# Altium PCB PCB2.PcbDoc
Units mil, origin at the board's own origin, x right, y up, seen from the top; angles counter-clockwise.
Board outline 3200 x 1735 mil, 2 copper layers (Top Layer, Bottom Layer); 117 components, 27 nets, 453 pads, 33 vias.
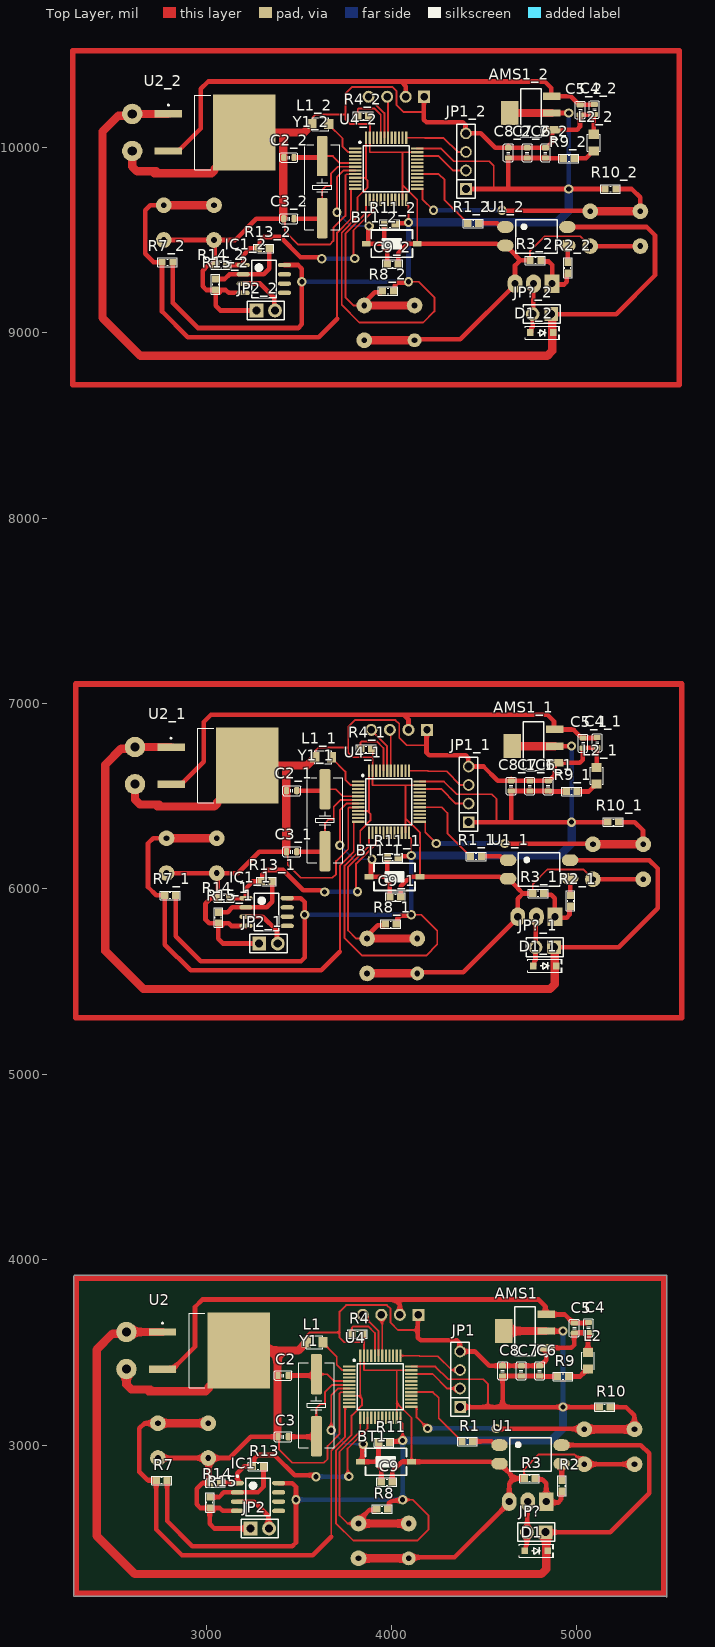
[diagram p0: Top Layer view]
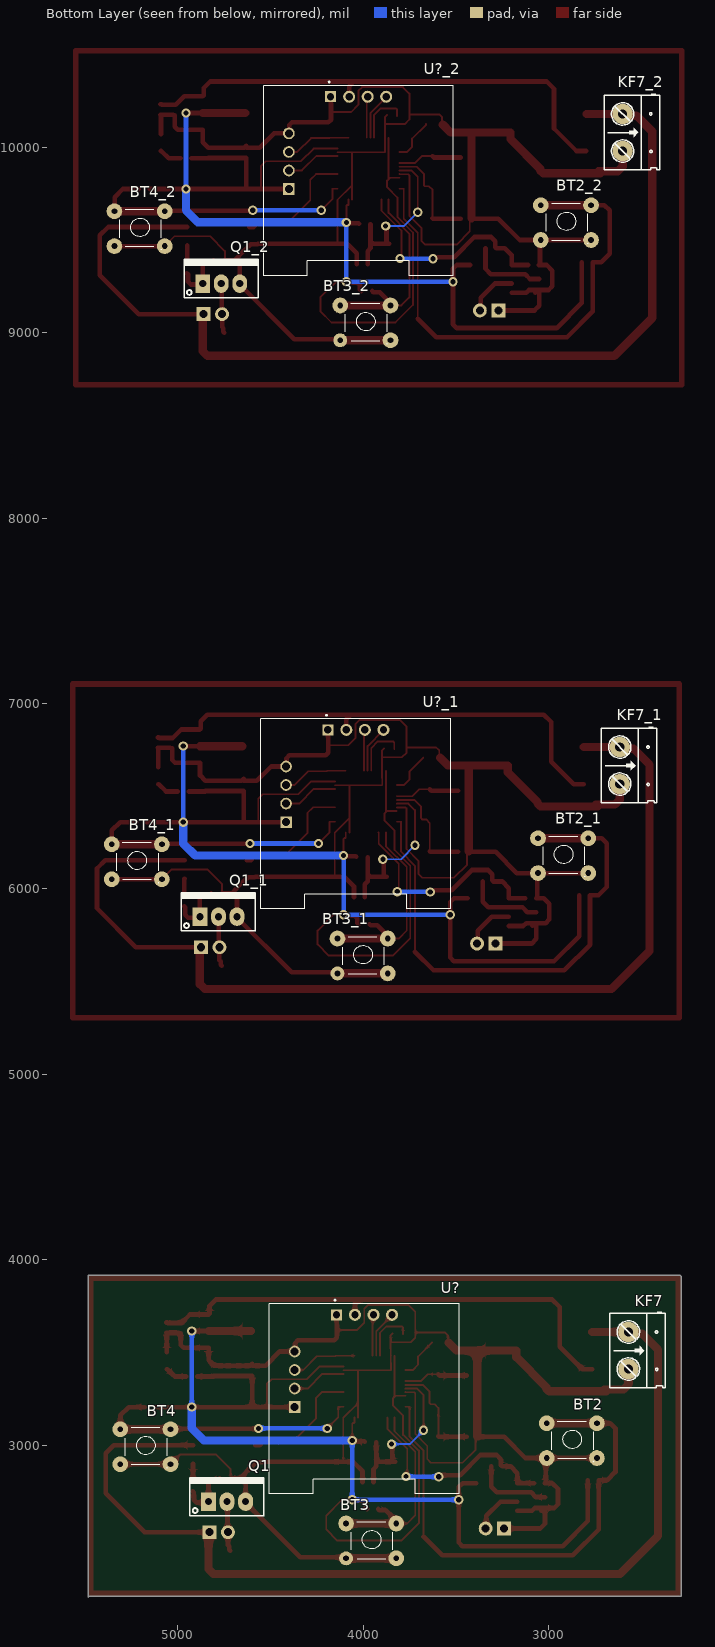
[diagram p1: Bottom Layer view, seen from below]

## Layer stack, top to bottom
Top Solder: solder mask 0.4, Solder Resist, Dk 3.5
Top Layer: signal copper 1.4
Dielectric 1: dielectric 12.6, FR-4, Dk 4.8
Bottom Layer: signal copper 1.4
Bottom Solder: solder mask 0.4, Solder Resist, Dk 3.5

## Board outline
2290,3915 5485,3915 5485,2180 5480,2185 2285,2185 2285,3910

## Design rules (kind name [scope] priority, off if disabled: settings)
Clearance [All] p1: gap=8 ignorepadtopadclearanceinfootprint=FALSE
PolygonConnect [All] p1: connectstyle=Relief reliefconductorwidth=10 reliefentries=4 polygonreliefangle="90 Angle" airgapwidth=10
RoomDefinition Sheet1 [InComponentClass('Sheet1')] p1: confinementstyle=ConfineIn formatcopy=TRUE lockcomponents=FALSE outline 7045,1060 17040,1060 17040,1850 7045,1850
RoutingVias [All] p1: holewidth=28 width=50 viastyle="Through Hole" minholewidth=28 minwidth=50 maxholewidth=28 maxwidth=50
SolderMaskExpansion [All] p1: expansion=4 istentingtop=FALSE
Width [All] p1: maxlimit=45 minlimit=10 preferedwidth=25
30 further rules are at their usual default settings.

## Classes and differential pairs
component class Sheet1: 10K AMS1 BT1 BT2 BT3 BT4 C2 C3 C4 C5 C6 C7 C8 C9 D1 IC1 JP1 JP2 JP? KF7 L1 L2 Q1 R1 R2 R3 R4 R7 R8 R9 R10 R11 R13 R14 R15 U1 U2 U3 U4 U? Y1

## Components (designator, comment, footprint, x,y, rotation, side; value= is the part's Value field where it differs from the comment)
AMS1 "AMS1117-3.3V" SOT223 4720,3615 r90 top value="AMS1117-3.3V SOT223"
AMS1_1 "AMS1117-3.3V" SOT223 4766.47,6770.3 r90 top value="AMS1117-3.3V SOT223" (schematic designator AMS1)
AMS1_2 "AMS1117-3.3V" SOT223 4751.47,10185.3 r90 top value="AMS1117-3.3V SOT223" (schematic designator AMS1)
BT1 "Nut Nhan 2 Chan SMD 3x6x2.5" "Nut Nhan 2 Chan SMD 3x6x2.5" 3970,2910 r180 top
BT1_1 "Nut Nhan 2 Chan SMD 3x6x2.5" "Nut Nhan 2 Chan SMD 3x6x2.5" 4016.47,6065.3 r180 top (schematic designator BT1)
BT1_2 "Nut Nhan 2 Chan SMD 3x6x2.5" "Nut Nhan 2 Chan SMD 3x6x2.5" 4001.47,9480.3 r180 top (schematic designator BT1)
BT2 "Nut Nhan 4 Chan Cam 6x6" "Nut Nhan 4 Chan Cam 6x6"#1 2998,3126 r180 bottom
BT2_1 "Nut Nhan 4 Chan Cam 6x6" "Nut Nhan 4 Chan Cam 6x6"#1 3044.47,6281.3 r180 bottom (schematic designator BT2)
BT2_2 "Nut Nhan 4 Chan Cam 6x6" "Nut Nhan 4 Chan Cam 6x6"#1 3029.47,9696.3 r180 bottom (schematic designator BT2)
BT3 "Nut Nhan 4 Chan Cam 6x6" "Nut Nhan 4 Chan Cam 6x6"#2 4080,2585 r180 bottom
BT3_1 "Nut Nhan 4 Chan Cam 6x6" "Nut Nhan 4 Chan Cam 6x6"#2 4126.47,5740.3 r180 bottom (schematic designator BT3)
BT3_2 "Nut Nhan 4 Chan Cam 6x6" "Nut Nhan 4 Chan Cam 6x6"#2 4111.47,9155.3 r180 bottom (schematic designator BT3)
BT4 "Nut Nhan 4 Chan Cam 6x6" "Nut Nhan 4 Chan Cam 6x6"#1 5298,3093 r180 bottom
BT4_1 "Nut Nhan 4 Chan Cam 6x6" "Nut Nhan 4 Chan Cam 6x6"#1 5344.47,6248.3 r180 bottom (schematic designator BT4)
BT4_2 "Nut Nhan 4 Chan Cam 6x6" "Nut Nhan 4 Chan Cam 6x6"#1 5329.47,9663.3 r180 bottom (schematic designator BT4)
C2 "20pF" "Cap 0603" 3415,3375 r180 top
C2_1 "20pF" "Cap 0603" 3461.47,6530.3 r180 top (schematic designator C2)
C2_2 "20pF" "Cap 0603" 3446.47,9945.3 r180 top (schematic designator C2)
C3 "20pF" "Cap 0603" 3415,3045 r180 top
C3_1 "20pF" "Cap 0603" 3461.47,6200.3 r180 top (schematic designator C3)
C3_2 "20pF" "Cap 0603" 3446.47,9615.3 r180 top (schematic designator C3)
C4 "10uF" "Cap 0603" 5062.53,3633.78 r270 top
C4_1 "10uF" "Cap 0603" 5109,6789.08 r270 top (schematic designator C4)
C4_2 "10uF" "Cap 0603" 5094,10204.08 r270 top (schematic designator C4)
C5 "0.1uF" "Cap 0603" 4986.55,3631.26 r270 top
C5_1 "0.1uF" "Cap 0603" 5033.01,6786.56 r270 top (schematic designator C5)
C5_2 "0.1uF" "Cap 0603" 5018.01,10201.56 r270 top (schematic designator C5)
C6 "10uF" "Cap 0603" 4799.17,3400.08 r90 top
C6_1 "10uF" "Cap 0603" 4845.64,6555.38 r90 top (schematic designator C6)
C6_2 "10uF" "Cap 0603" 4830.64,9970.38 r90 top (schematic designator C6)
C7 "0.1uF" "Cap 0603" 4700.16,3400.08 r90 top
C7_1 "0.1uF" "Cap 0603" 4746.63,6555.38 r90 top (schematic designator C7)
C7_2 "0.1uF" "Cap 0603" 4731.63,9970.38 r90 top (schematic designator C7)
C8 "0.1uF" "Cap 0603" 4599.17,3400.08 r90 top
C8_1 "0.1uF" "Cap 0603" 4645.64,6555.38 r90 top (schematic designator C8)
C8_2 "0.1uF" "Cap 0603" 4630.64,9970.38 r90 top (schematic designator C8)
C9 "103" "tu 0603" 3974.53,2800 r0 top
C9_1 "103" "tu 0603" 4020.99,5955.3 r0 top (schematic designator C9)
C9_2 "103" "tu 0603" 4005.99,9370.3 r0 top (schematic designator C9)
D1 "S4" "DIODE SOD-123" 4780,2430 r0 top
D1_1 "S4" "DIODE SOD-123" 4826.47,5585.3 r0 top (schematic designator D1)
D1_2 "S4" "DIODE SOD-123" 4811.47,9000.3 r0 top (schematic designator D1)
IC1 "LM358 SOP8" "SOP 8" 3280,2720 r0 top
IC1_1 "LM358 SOP8" "SOP 8" 3326.47,5875.3 r0 top (schematic designator IC1)
IC1_2 "LM358 SOP8" "SOP 8" 3311.47,9290.3 r0 top (schematic designator IC1)
JP1 "JP 1x4 2.54" "JP 1x4 DT" 4370,3205 r90 top
JP1_1 "JP 1x4 2.54" "JP 1x4 DT" 4416.47,6360.3 r90 top (schematic designator JP1)
JP1_2 "JP 1x4 2.54" "JP 1x4 DT" 4401.47,9775.3 r90 top (schematic designator JP1)
JP2 "JP 1x2 2.54" "JP 1x2 DT" 3240,2550 r0 top
JP2_1 "JP 1x2 2.54" "JP 1x2 DT" 3286.47,5705.3 r0 top (schematic designator JP2)
JP2_2 "JP 1x2 2.54" "JP 1x2 DT" 3271.47,9120.3 r0 top (schematic designator JP2)
JP? "JP 1x2 2.54" "JP 1x2 DT" 4830,2530 r180 top
JP?_1 "JP 1x2 2.54" "JP 1x2 DT" 4876.47,5685.3 r180 top (schematic designator JP?)
JP?_2 "JP 1x2 2.54" "JP 1x2 DT" 4861.47,9100.3 r180 top (schematic designator JP?)
KF7 "VIN" "Con 2 KF301 5.08" 2570,3610 r270 bottom
KF7_1 "VIN" "Con 2 KF301 5.08" 2616.47,6765.3 r270 bottom (schematic designator KF7)
KF7_2 "VIN" "Con 2 KF301 5.08" 2601.47,10180.3 r270 bottom (schematic designator KF7)
L1 "LED 0805" LED-0805-Red 3630,3555 r180 top
L1_1 "LED 0805" LED-0805-Red 3676.47,6710.3 r180 top (schematic designator L1)
L1_2 "LED 0805" LED-0805-Red 3661.47,10125.3 r180 top (schematic designator L1)
L2 "LED 0805" LED-0805-Red 5060,3410 r90 top
L2_1 "LED 0805" LED-0805-Red 5106.47,6565.3 r90 top (schematic designator L2)
L2_2 "LED 0805" LED-0805-Red 5091.47,9980.3 r90 top (schematic designator L2)
Q1 "IRFZ44" TO220 4835,2695 r180 bottom
Q1_1 "IRFZ44" TO220 4881.47,5850.3 r180 bottom (schematic designator Q1)
Q1_2 "IRFZ44" TO220 4866.47,9265.3 r180 bottom (schematic designator Q1)
R1 "220R" "RES 0603" 4409.53,3020 r0 top
R1_1 "220R" "RES 0603" 4455.99,6175.3 r0 top (schematic designator R1)
R1_2 "220R" "RES 0603" 4440.99,9590.3 r0 top (schematic designator R1)
R2 "10k" "RES 0603" 4920,2780 r90 top
R2_1 "10k" "RES 0603" 4966.47,5935.3 r90 top (schematic designator R2)
R2_2 "10k" "RES 0603" 4951.47,9350.3 r90 top (schematic designator R2)
R3 "10K" "RES 0603" 4745,2820 r180 top
R3_1 "10K" "RES 0603" 4791.47,5975.3 r180 top (schematic designator R3)
R3_2 "10K" "RES 0603" 4776.47,9390.3 r180 top (schematic designator R3)
R4 "?" "RES 0603" 3816.44,3598.56 r0 top
R4_1 "?" "RES 0603" 3862.9,6753.86 r0 top (schematic designator R4)
R4_2 "?" "RES 0603" 3847.9,10168.86 r0 top (schematic designator R4)
R7 "10k" "tro smd 0603" 2760,2810 r0 top
R7_1 "10k" "tro smd 0603" 2806.47,5965.3 r0 top (schematic designator R7)
R7_2 "10k" "tro smd 0603" 2791.47,9380.3 r0 top (schematic designator R7)
R8 "10k" "tro smd 0603" 3949.53,2655 r0 top
R8_1 "10k" "tro smd 0603" 3995.99,5810.3 r0 top (schematic designator R8)
R8_2 "10k" "tro smd 0603" 3980.99,9225.3 r0 top (schematic designator R8)
R9 "100R" "RES 0603" 4925,3370 r0 top
R9_1 "100R" "RES 0603" 4971.47,6525.3 r0 top (schematic designator R9)
R9_2 "100R" "RES 0603" 4956.47,9940.3 r0 top (schematic designator R9)
R10 "10k" "tro smd 0603" 5150,3205 r180 top
R10_1 "10k" "tro smd 0603" 5196.47,6360.3 r180 top (schematic designator R10)
R10_2 "10k" "tro smd 0603" 5181.47,9775.3 r180 top (schematic designator R10)
R11 "10k" "tro smd 0603" 3960,3015 r180 top
R11_1 "10k" "tro smd 0603" 4006.47,6170.3 r180 top (schematic designator R11)
R11_2 "10k" "tro smd 0603" 3991.47,9585.3 r180 top (schematic designator R11)
R13 "10K" "RES 0603" 3280,2885 r180 top
R13_1 "10K" "RES 0603" 3326.47,6040.3 r180 top (schematic designator R13)
R13_2 "10K" "RES 0603" 3311.47,9455.3 r180 top (schematic designator R13)
R14 "10k" "RES 0603" 3050,2795 r0 top
R14_1 "10k" "RES 0603" 3096.47,5950.3 r0 top (schematic designator R14)
R14_2 "10k" "RES 0603" 3081.47,9365.3 r0 top (schematic designator R14)
R15 "100" "RES 0603" 3020,2690 r90 top
R15_1 "100" "RES 0603" 3066.47,5845.3 r90 top (schematic designator R15)
R15_2 "100" "RES 0603" 3051.47,9260.3 r90 top (schematic designator R15)
U1 "OPTO PC817 SMD" SOP4 4750,2950 r0 top value=PC817
U1_1 "OPTO PC817 SMD" SOP4 4796.47,6105.3 r0 top value=PC817 (schematic designator U1)
U1_2 "OPTO PC817 SMD" SOP4 4781.47,9520.3 r0 top value=PC817 (schematic designator U1)
U2 "L7805CD2T" TO254P1542X460-3N 3017.36,3510 r0 top
U2_1 "L7805CD2T" TO254P1542X460-3N 3063.83,6665.3 r0 top (schematic designator U2)
U2_2 "L7805CD2T" TO254P1542X460-3N 3048.83,10080.3 r0 top (schematic designator U2)
U4 "STM32F103C8T6" LQFP-48_19.6_393_58X11_SMD 3940,3315 r0 top
U4_1 "STM32F103C8T6" LQFP-48_19.6_393_58X11_SMD 3986.47,6470.3 r0 top (schematic designator U4)
U4_2 "STM32F103C8T6" LQFP-48_19.6_393_58X11_SMD 3971.47,9885.3 r0 top (schematic designator U4)
U? "DM-OLED096-636" MODULE_DM-OLED096-636 3995,3250 r180 bottom
U?_1 "DM-OLED096-636" MODULE_DM-OLED096-636 4041.47,6405.3 r180 bottom (schematic designator U?)
U?_2 "DM-OLED096-636" MODULE_DM-OLED096-636 4026.47,9820.3 r180 bottom (schematic designator U?)
Y1 "8MHZ" "Thach Anh 2 chan SMD" 3595,3215 r90 top value=4Mhz
Y1_1 "8MHZ" "Thach Anh 2 chan SMD" 3641.47,6370.3 r90 top value=4Mhz (schematic designator Y1)
Y1_2 "8MHZ" "Thach Anh 2 chan SMD" 3626.47,9785.3 r90 top value=4Mhz (schematic designator Y1)

## Footprints (in the part's own frame and the unit in brackets; to place one, negate y for a bottom-side part, rotate by r counter-clockwise, add the part's x,y. Pads: shape width x height; smd on the part's side, far side on the other; paste and mask are expansions set on the pad)
"Cap 0603" [mm]
  rrect50% 0.7x1 smd: 1(-0.7,0) 2(0.7,0)
  silkscreen extent -1.22,-0.67 1.23,0.68, body extent -0.79,-0.4 0.81,0.4, height 0.8
"Con 2 KF301 5.08" [mil]
  round 110 hole 50: 1(0,0) 2(200,0)
  silkscreen extent -106,-100 300,200, body extent -45,-97 255,190, height 335
"DIODE SOD-123" [mm] "SOD-123"
  rect 0.9x0.95 smd: 1(-1.575,0) 2(1.575,0)
  silkscreen extent -2.3,-0.92 2.41,0.92, body extent -1.86,-0.78 1.86,0.77, height 1.35
"JP 1x2 DT" [mm] "2 pins, 1 row, straight, gold plating"
  rect 1.905x1.905 hole 1.1: 1(0,0)
  round 1.905 hole 1.1: 2(2.54,0)
  silkscreen extent -1.27,-1.27 3.81,1.27, body extent -1.27,-1.27 3.81,1.27, height 8.54
"JP 1x4 DT" [mm] "4 pins, 1 row, straight, gold plating"
  rect 1.6x1.6 hole 1.1: 1(0,0)
  round 1.6 hole 1.1: 2(2.54,0) 3(5.08,0) 4(7.62,0)
  silkscreen extent -1.27,-1.27 8.89,1.27, body extent -1.27,-1.27 8.89,1.27, height 8.54
LED-0805-Red [mil]
  rect 50x55 smd: 1(0,0) 2(90,0)
  silkscreen extent 0,-35 90,35, body extent 5,-25 85,25, height 43
LQFP-48_19.6_393_58X11_SMD [mm] "48LQFP"
  rect 1.7x0.3 smd mask+0.076: 1(-4.238,2.75) 2(-4.238,2.25) 3(-4.238,1.75) 4(-4.238,1.25) 5(-4.238,0.75) 6(-4.238,0.25) 7(-4.238,-0.25) 8(-4.238,-0.75) 9(-4.238,-1.25) 10(-4.238,-1.75) 11(-4.238,-2.25) 12(-4.238,-2.75) 25(4.238,-2.75) 26(4.238,-2.25) 27(4.238,-1.75) 28(4.238,-1.25) 29(4.238,-0.75) 30(4.238,-0.25) 31(4.238,0.25) 32(4.238,0.75) 33(4.238,1.25) 34(4.238,1.75) 35(4.238,2.25) 36(4.238,2.75)
  rect 0.3x1.7 smd mask+0.076: 13(-2.75,-4.238) 14(-2.25,-4.238) 15(-1.75,-4.238) 16(-1.25,-4.238) 17(-0.75,-4.238) 18(-0.25,-4.238) 19(0.25,-4.238) 20(0.75,-4.238) 21(1.25,-4.238) 22(1.75,-4.238) 23(2.25,-4.238) 24(2.75,-4.238) 37(2.75,4.238) 38(2.25,4.238) 39(1.75,4.238) 40(1.25,4.238) 41(0.75,4.238) 42(0.25,4.238) 43(-0.25,4.238) 44(-0.75,4.238) 45(-1.25,4.238) 46(-1.75,4.238) 47(-2.25,4.238) 48(-2.75,4.238)
  silkscreen extent -3.72,-3.15 3.15,3.72, body extent -4.5,-4.5 4.5,4.5, height 1.7
MODULE_DM-OLED096-636 [mm]
  rect 1.508x1.508 / inner round 1.508 / far side rect 1.651x1.651 hole 1: 1(-3.81,11.5)
  round 1.651 hole 1: 2(-1.27,11.5) 3(1.27,11.5) 4(3.81,11.5)
  round 0 all layers, no hole: S1(-11,11) S2(11,11) S3(11,-11) S4(-11,-11)
  silkscreen extent -13,-13 13,13.6, body extent -13,-13 13,13, height 5.66
"Nut Nhan 2 Chan SMD 3x6x2.5" [mm] "Switch SMD type"
  rect 1.2x0.8 smd: 1(-3.5,0) 2(3.5,0)
  silkscreen extent -2.82,-1.85 2.82,1.85, body extent -3.05,-1.85 3.05,1.85, height 2.5
"Nut Nhan 4 Chan Cam 6x6"#1 [mil] "SW button 4pin, 250 x250 mil"
  round 85 hole 31: 1(-13,-8) 1(258,-8) 2(-13,-196) 2(258,-196)
  silkscreen extent 15,-215 240,0, body extent -31,-225 281,19, height 276
"Nut Nhan 4 Chan Cam 6x6"#2 [mil] "SW button 4pin, 250 x250 mil"
  round 85 hole 31: 1(-13,-8) 1(258,-8) 2(258,-196)
  round 75 hole 31: 2(-13,-196)
  silkscreen extent 15,-215 240,0, body extent -31,-225 281,19, height 276
"RES 0603" [mm] "RES 0603"
  rect 1x0.95 smd mask+0.076: 1(-0.75,0) 2(0.75,0)
  silkscreen extent -1.35,-0.58 1.37,0.58, body extent -0.82,-0.42 0.82,0.43, height 0.44
SOP4 [mm]
  oval 2.25x1.6 smd: 1(-4.25,1.27) 2(-4.25,-1.27) 3(4.25,-1.27) 4(4.25,1.27)
  silkscreen extent -2.85,-2.3 2.85,2.3, body extent -4.67,-2.29 4.93,2.31, height 3.6
"SOP 8" [mm] "SOIC, 8-Leads, Body 4.9x3.9mm, Pitch 1.27mm, IPC High Density"
  oval 1.8x0.6 smd: 1(-2.825,1.905) 2(-2.825,0.635) 3(-2.825,-0.635) 4(-2.825,-1.905) 5(2.825,-1.905) 6(2.825,-0.635) 7(2.825,0.635) 8(2.825,1.905)
  silkscreen extent -2.95,-2.55 1.68,2.98, body extent -2.99,-2.45 3,2.45, height 1.6
SOT223 [mm]
  rect 1x2.4 smd: 1(-2.3,-2.9) 2(0,-2.9) 3(2.3,-2.9)
  rect 3.3x2.4 smd: 4(0,2.9)
  silkscreen extent -3.47,-3.03 3.35,1.4, body extent -3.25,-3.56 3.25,3.4, height 1.68
"Thach Anh 2 chan SMD" [mm] "SMD Crystal HC49/US-SM package"
  round 0.508 on Mech15: 0(0,0)
  rrect25% 5.5x1.5 smd: 1(-4.25,0) 2(4.25,0)
  silkscreen extent -5.84,-2.41 5.84,2.41, body extent -6.4,-2.41 6.4,2.42, height 4.29
TO220 [mil] "TO-220"
  rect 80x100 hole 39: 1(0,0)
  oval 80x100 hole 39: 2(100,0) 3(200,0)
  silkscreen extent -100,-76 300,130, body extent -95,-80 295,97, height 323
TO254P1542X460-3N [mm]
  rect 3.74x1.02 smd: 1(-6.41,2.54) 2(-6.41,-2.54)
  rect 8.56x10.37 smd paste-6: 3(4,0)
  silkscreen extent -6.51,-5.1 -0.59,5.1, body extent -7.71,-5.1 7.71,5.1, height 4.6
"tro smd 0603" [mm] "Chip Capacitor, 2-Leads, Body 1,60x0,80mm, IPC Medium Density"
  rect 1x0.95 smd mask+0.076: 1(-0.75,0) 2(0.75,0)
  silkscreen extent -1.35,-0.58 1.37,0.58, body extent -0.82,-0.42 0.82,0.43, height 0.44
"tu 0603" [mm] "Chip Capacitor, 2-Leads, Body 1,60x0,80mm, IPC Medium Density"
  rect 1x0.95 smd mask+0.076: 1(-0.75,0) 2(0.75,0)
  silkscreen extent -1.35,-0.58 1.37,0.58, body extent -0.8,-0.4 0.8,0.4, height 0.9

## Part data
AMS1 AMS1_1 AMS1_2: library part "AMS1117 SMD", "Dán", Chung_Loai=Dán, Don_Vi=Con, Ma_Hang=MH000596
BT2 BT2_1 BT2_2 BT3 BT3_1 BT3_2 BT4 BT4_1 BT4_2: "Nut Nhan 4 Chan 6x6mm", Ma_Hang=MH004584, Ten="Nút Nhấn 4 Chân 6x6x5MM DIP"
C2 C2_1 C2_2 C3 C3_1 C3_2 C4 C4_1 C4_2 C5 C5_1 C5_2 C6 C6_1 C6_2 C7 C7_1 C7_2 C8 C8_1 C8_2: library part "Cap 0603", "Capacitor SMD 0603"
C9 C9_1 C9_2: library part "Tu 0603 103 50V 10%", "Dán", Chung_Loai=Dán, Don_Vi=Con, Ma_Hang=MH004567, So_Chan=2, Ten_Linh_Kien="Tụ 0603 103-10nF 10% 50V"
D1 D1_1 D1_2: library part "Diode S4", "Dán", Chung_Loai=Dán, Don_Vi=Con, Ma_Hang=MH005519, Ten_Linh_Kien="Diode S4 SOD123 ( 1N5819 SOD123)"
IC1 IC1_1 IC1_2: "Dán", Chung_Loai=Dán, Don_Vi=Con, Ma_Hang=MH000609, Ten_Linh_Kien="LM358 SOP8"
JP1 JP1_1 JP1_2: library part "JP 1x4 2.54 Duc Thang", "Cắm", Chung_Loai=Cắm, Don_Vi=Con, Ma_Hang=MH000903, Ten_Linh_Kien="Jump Đơn Đực 2.54MM 1x40P Thẳng 11MM"
JP2 JP2_1 JP2_2 JP? JP?_1 JP?_2: library part "JP 1x2 2.54 Duc Thang", "Cắm", Chung_Loai=Cắm, Don_Vi=Con, Ma_Hang=MH000903, Ten_Linh_Kien="Jump Đơn Đực 2.54MM 1x40P Thẳng 11MM"
KF7 KF7_1 KF7_2: library part "CON 2 KF301", "Cắm", Chung_Loai=Cắm, Don_Vi=Con, Ma_Hang=MH000987, Ten_Linh_Kien="CON 2 KF301-2P 5.08MM Xanh Dương"
L1 L1_1 L1_2 L2 L2_1 L2_2: library part "LED 0805 Do", "Dán", Chung_Loai=Dán, Don_Vi=Con, Ma_Hang=MH000897, Ten_Linh_Kien="LED 0805 Màu Đỏ (Red)"
Q1 Q1_1 Q1_2: library part "FET IRFZ44 DIP", "TO-220"
R1 R1_1 R1_2 R3 R3_1 R3_2 R4 R4_1 R4_2 R9 R9_1 R9_2 R13 R13_1 R13_2 R15 R15_1 R15_2: library part "RES 0603", "RES SMD 0603", Manufacturer="Vishay Dale", Manufacturer Part Number=CRCW040210K0FKED, Operating Temperature="-55°C ~ 155°C", Package / Case="0402 (1005 Metric)", Power (Watts)="0.063W, 1/16W", Resistance (Ohms)=10k, Supplier Part Number 1=541-10.0KLCT-ND, Temperature Coefficient=±100ppm/°C, Tolerance=±1%, Category=Resistors, ComponentLink1Description=http://www.vishay.com/docs/20035/dcrcwe3.pdf, ComponentLink1URL=http://www.vishay.com/docs/20035/dcrcwe3.pdf, Composition="Thick Film", Features="Automotive AEC-Q200", Height="0.016\" (0.40mm)", Number of Terminations=2, Packaging="Cut Tape (CT)", Pricing 1="10=0.083, 50=0.0444, 200=0.0255, 1000=0.0174 (USD)", RoHS="RoHS Compliant", Size / Dimension="0.039\" L x 0.020\" W (1.00mm x 0.50mm)", Stock 1=2392462, Supplier 1=Digi-Key, Supplier Device Package="0402 (1005 Metric)"
R2 R2_1 R2_2 R14 R14_1 R14_2: library part "RES 0603", "RES SMD 0603", Manufacturer="Vishay Dale", Manufacturer Part Number=CRCW040210K0FKED, Operating Temperature="-55°C ~ 155°C", Package / Case="0402 (1005 Metric)", Power (Watts)="0.063W, 1/16W", Supplier Part Number 1=541-10.0KLCT-ND, Temperature Coefficient=±100ppm/°C, Tolerance=±1%, Category=Resistors, ComponentLink1Description=http://www.vishay.com/docs/20035/dcrcwe3.pdf, ComponentLink1URL=http://www.vishay.com/docs/20035/dcrcwe3.pdf, Composition="Thick Film", Features="Automotive AEC-Q200", Height="0.016\" (0.40mm)", Number of Terminations=2, Packaging="Cut Tape (CT)", Pricing 1="10=0.083, 50=0.0444, 200=0.0255, 1000=0.0174 (USD)", Resistance (Ohms)=10k, RoHS="RoHS Compliant", Size / Dimension="0.039\" L x 0.020\" W (1.00mm x 0.50mm)", Stock 1=2392462, Supplier 1=Digi-Key, Supplier Device Package="0402 (1005 Metric)"
R7 R7_1 R7_2 R8 R8_1 R8_2 R10 R10_1 R10_2 R11 R11_1 R11_2: library part "Tro 0603 1% 10k", "Dán", Chung_Loai=Dán, Don_Vi=Con, Ma_Hang=MH006333, So_Chan=2, Ten_Linh_Kien="Trở 0603 1% 10k"
U1 U1_1 U1_2: "Single Opto"
U2 U2_1 U2_2: "Linear Voltage Regulator IC Positive Fixed 1 Output 1.5A D2PAK", Package="D2PAK STMicroelectronics", Check_prices=https://www.snapeda.com/parts/L7805CD2T/STMicroelectronics/view-part/?ref=eda, MF=STMicroelectronics, MP=L7805CD2T, SnapEDA_Link=https://www.snapeda.com/parts/L7805CD2T/STMicroelectronics/view-part/?ref=snap
U4 U4_1 U4_2: library part IC_STM32F103C8T6, "ARM® Cortex®-M3 STM32F1 Microcontroller IC 32-Bit 72MHz 64KB (64K x 8) FLASH 48-LQFP (7x7)", Alternate Part Number-1=NA, Case/Package=LQFP48, Manufacturer=STMicroelectronics, Manufacturer Part Number=STM32F103C8T6, Supplier Part Number-1=STM32F103C8T6, Supplier-1=LCSC
U? U?_1 U?_2: "0.96â€ 128 X 64 MONOCHROME GRAPHIC OLED DISPLAY MODULE - I2C", Package=Package, Check_prices=https://www.snapeda.com/parts/DM-OLED096-636/Display+Module/view-part/?ref=eda, MF="Display Module", MP=DM-OLED096-636, SnapEDA_Link=https://www.snapeda.com/parts/DM-OLED096-636/Display+Module/view-part/?ref=snap
Y1 Y1_1 Y1_2: library part "Thach Anh 2 chan SMD", "Crystal For all Crystal 2pin."
BT1 BT1_1 BT1_2: Ma_Hang=MH001036, Ten="Nút Nhấn 2 Chân 3x6x2.5MM SMD"

## Via types
v1: diameter 50, hole 28, Top Layer to Bottom Layer, 33 vias

## Nets (pads, with @x,y where several pads share a name; then routed paths per layer and width w, separated by ;. In a path a pad name is that pad's centre, name@x,y a point inside that pad or via, vN(x,y) a via of type N, cw(c..) or ccw(c..) an arc to the next point about the centre after c; other vN are vias at no path point)
1: Q1.1 R2.1 R3.1 | length 306.2
  Top Layer w25: R3.1 4780.73,2813.8 4816.2,2813.8 4835,2795 Q1.1 4840,2690 4899.15,2690 4913.8,2704.64 4913.8,2744.27 R2.1
5v: AMS1.3 C4.1 C5.1 U2.2 U?.2 | length 2747.5
  Top Layer w25: U2.2 2818.54,3410 2940,3531.46 2940,3745 2980,3785 4020,3785 ; U?.2 4045,3760 4020,3785 ; C4.1 5056.63,3661.34 5054.11,3658.82 C5.1 4980.64,3658.82 4935,3704.46 4835.27,3704.46 AMS1.3 4830,3709.72 4830,3750 4795,3785 4020,3785
ADC1: IC1.1 R13.2 R14.2 U4.15 | length 1219.4
  Top Layer w10: v1(3770,2830) 3762.68,2837.32 3762.68,2981.32 3870.32,3088.96 3870.32,3147.37 U4.15
  Top Layer w25: R14.2 IC1.1 3168.78,2848.78 3205,2885 3251.46,2885 3257.66,2891.2 3257.66,2924.08 3279.97,2946.4 3368.6,2946.4 3477.57,2837.43 3570.42,2837.43 3574.4,2833.45 3587.99,2833.45 v1(3592.77,2828.66)
  Bottom Layer w25: v1(3592.77,2828.66) 3593.44,2829.33 3769.33,2829.33 v1(3770,2830)
ADC2: U4.16
CLK: JP1.3 U4.37 | length 353.6
  Top Layer w10: U4.37 4148.66,3481.85 4151.01,3479.5 4250.5,3479.5 4325,3405 JP1.3
decrease: BT4.1 R10.1 U4.25 | length 1512
  Top Layer w10: U4.25 4134.41,3206.73 4135.31,3205.83 4135.31,3149.68 v1(4195,3090)
  Top Layer w25: v1(4565,3090) 4567.5,3087.5 5037.5,3087.5 BT4.1@5040,3085 ; R10.1 5265,3205 5310,3160 5310,3086 BT4.1@5311,3085
  Top Layer w45: BT4.1@5040,3085 BT4.1@5311,3085
  Bottom Layer w25: v1(4195,3090) v1(4565,3090)
increase: BT2.1 R7.1 U4.12 | length 2791.3
  Top Layer w10: 3675,2505 3675,2970 3750,3045 3750,3205.83 3750.91,3206.73 U4.12
  Top Layer w25: BT2.1@2740,3118 2668,3118 2640,3090 2640,2855 2685,2810 R7.1 2730.47,2544.53 2870,2405 3575,2405 3675,2505
  Top Layer w45: BT2.1@2740,3118 BT2.1@3011,3118
IO: JP1.2 U4.34 | length 295.8
  Top Layer w10: U4.34 4221.1,3383.9 4300,3305 JP1.2
Net10K_2: U4.20
NetC2_1: C2.1 U4.5 Y1.2 | length 349.3
  Top Layer w10: Y1.2 3652.68,3382.32 3690.25,3344.75 3772.93,3344.75 U4.5
  Top Layer w25: C2.1 3587.68,3375 Y1.2
NetC3_1: C3.1 U4.6 Y1.1 | length 571.6
  Top Layer w10: Y1.1 3595,3200 3615,3220 3636.14,3220 3642,3225.86 3642,3287 3679.84,3324.84 U4.6
  Top Layer w25: C3.1 3592.32,3045 Y1.1
NetD1_1: D1.1 JP?.2 Q1.2 | length 272
  Top Layer w25: D1.1 4723.21,2435.22 4723.21,2454.21 4730,2461 JP?.2 4732.5,2532.5 4732.5,2692.5 Q1.2
NetIC1_2: IC1.2 R13.1 R15.2 | length 422.8
  Top Layer w25: R15.2 3069.53,2719.53 3095,2745 IC1.2 3280,2745 3309.53,2774.53 R13.1
NetL1_1: L1.1 U4.2 | length 233
  Top Layer w10: L1.1 3630,3552.5 3705,3477.5 3705,3433.66 3734.3,3404.36 3772.37,3404.36 U4.2
NetL2_1: L2.1 R9.2 | length 122
  Top Layer w25: R9.2 5017.5,3370 5057.5,3410 L2.1
NetR1_2: R1.2 U1.1 | length 151.9
  Top Layer w25: R1.2 4539.6,3020 4559.6,3000 U1.1
NetR2_2: R2.2 U1.3 | length 91.6
  Top Layer w25: U1.3 4918.66,2898.66 4918.66,2810.87 R2.2
NetR4_1: R4.1 U4.44 | length 299.7
  Top Layer w10: R4.1 3786.41,3599.07 3786.41,3634.14 3792.26,3640 3875,3640 3910.47,3604.53 U4.44
PWM: R1.1 U4.29 | length 447.6
  Top Layer w10: U4.29 4223.67,3285.47 4255,3254.14 4255,3145 4365.31,3034.69 4365.31,3033.7 4379.02,3020 R1.1
RESET: BT1.2 C9.1 R11.2 U4.7 | length 1019
  Top Layer w10: v1(3675,3080) 3675,3270 3710,3305 3772.99,3305 U4.7
  Top Layer w25: BT1.2@3843.22,2910 3915.36,2910 ; v1(3848,3005) 3843.22,3000.22 3843.22,2913.25 3839.97,2910 3827.85,2910 3915.36,2910 ; R11.2 3930,3014.53 3930,2965.47 3930,2924.64 ; C9.1 3945,2870 3930,2885 3930,2924.64 ; 3915.36,2910 3930,2924.64
  Bottom Layer w10: v1(3675,3080) 3750,3005 v1(3848,3005)
SCL: U4.42 U?.3 | length 222.9
  Top Layer w10: U?.3 3949.84,3697.91 U4.42
SDA: U4.43 U?.4 | length 256.2
  Top Layer w10: U?.4 3845,3700 3930.16,3614.84 U4.43
sleep: BT3.1 R8.1 U4.13 | length 1096.8
  Top Layer w10: BT3.1@3822,2577 3763,2577 3719.58,2620.42 3719.58,2963.67 3831.73,3075.82 U4.13
  Top Layer w25: BT3.1@3817,2587 3878.8,2648.8 3913.8,2648.8 R8.1
  Top Layer w45: BT3.1@3822,2577 BT3.1@4093,2577
ther+: IC1.3 JP2.2 | length 269.4
  Top Layer w25: IC1.3 3260,2695 3336,2619 3336,2554 JP2.2
VCC: D1.2 JP?.1 KF7.1 U1.4 U2.1 | length 5474.2
  Top Layer w25: JP?.1 5180,2530 5390,2740 5390,2955 5345,3000 U1.4
  Top Layer w45: U2.1 KF7.1 2560.88,3600.88 2495.88,3600.88 2410,3515 2410,2510 2615,2305 4808.64,2305 4835,2331.36 4835,2430 4835,2525 JP?.1
VDDA: AMS1.2 AMS1.4 C6.1 C7.1 C8.1 IC1.8 JP1.1 R7.2 R8.2 R9.1 R10.2 R11.1 U4.9 U4.24 U4.36 U4.48 | length 7964.8
  Top Layer w10: U4.9 3824.21,3265.79 3831.73,3258.27 ; U4.48 3831.73,3258.27 ; R11.1 R11.1@3992.03,3017.5 ; U4.24 4048.27,3120.59 4049.17,3119.68 4054.14,3119.68 4060,3113.83 v1(4060,3025) ; v1(4060,2705) 4115,2705 4200,2620 4200,2545 4140,2485 3795,2485 3700.5,2579.5 3700.5,2970.04 3785,3054.54 3785,3159.17 3840,3214.17 3840,3250 3831.73,3258.27 ; U4.36 4236.73,3423.27 4305,3355 4495,3355 4520,3330 4520,3205
  Top Layer w25: R7.2 2789.53,2590.47 2925,2455 3465.36,2455 3485,2474.64 3485,2774.15 3464.15,2795 IC1.8 ; R8.2 3980.04,2655 3986.24,2661.2 3986.24,2685.57 4000.89,2700.22 4055.22,2700.22 v1(4060,2705) ; R11.1@3992.03,3017.5 3994.74,3020.22 4055.22,3020.22 v1(4060,3025) ; JP1.1 4520,3205 v1(4925,3205) R10.2 ; 4599.17,3205 C8.1 C7.1 C6.1 4805.08,3372.52 4807.6,3370 R9.1 ; AMS1.2 v1(4925,3615)
  Top Layer w45: AMS1.4 AMS1.2
  Bottom Layer w25: v1(3485,2705) v1(4060,2705) v1(4060,3025) ; v1(4925,3205) v1(4925,3615)
  Bottom Layer w45: v1(4060,3025) 4860,3025 4925,3090 v1(4925,3205)
VSSA: AMS1.1 BT1.1 BT2.2 BT3.2 BT4.2 C2.2 C3.2 C4.2 C5.2 C6.2 C7.2 C8.2 C9.2 IC1.4 JP1.4 JP2.1 KF7.2 L1.2 L2.2 Q1.3 R3.2 R4.2 R14.1 R15.1 U1.2 U2.3 U4.8 U4.23 U4.35 U4.47 U?.1 | length 10239.7
  Top Layer w10: C3.2@3385,3047.44 3385,3045 3394.04,3035.96 3394.04,2975.96 3465,2905 3635,2905 3655,2925 3655,2995 3720,3060 3720,3278.84 3725.86,3284.69 3772.37,3284.69 U4.8 ; L1.2 3543.87,3558.87 3543.87,3591.64 3559.73,3607.5 3720,3607.5 ; R4.2@3840.96,3603.56 3852.4,3592.13 3852.4,3556.52 ; 3851.42,3443 3851.42,3403.58 4030,3403.58 ; 3852.2,3443 3852.2,3481.07 U4.47 3852.2,3482.63 3852.2,3520.7 3852.4,3520.9 3852.4,3556.52 ; U4.23 4028.58,3226.42 ; 4050,2905 4055,2910 ; U4.35 4030,3403.58 ; BT1.1 4107.8,3147.2 4028.58,3226.42 ; 4140,3665 4140,3697.76 U?.1 ; 4142.53,3620 4035,3620 3995,3660 3995,3735 3975,3755 3755,3755 3720,3720 3720,3607.5 ; R3.2 4715.47,2870.47 4795,2950 4987,2950 BT4.2@5040,2897 ; 3720,3607.5 3720,3580 3745,3555 3850.89,3555 3852.4,3556.52 ; 4028.58,3226.42 4028.58,3402.17 4030,3403.58
  Top Layer w25: 2689.54,3289.54 2700,3300 ; BT2.2@2740,2930 BT2.2@3011,2930 ; 3040.85,2645.69 3033.25,2653.29 3026.2,2653.29 3020,2659.49 3020,2575 3045,2550 JP2.1 ; IC1.4 3090,2645 3074.53,2660.47 3033.25,2660.47 R15.1 2969.53,2660.47 2950,2680 2950,2765 2980,2795 R14.1 3015.74,2799.74 3015.74,2925.26 BT2.2@3011,2930 ; C3.2@3385,3045 3240,3045 3125,2930 BT2.2@3011,2930 ; L1.2@3540,3552.5 L1.2 ; C9.2 4004.06,2859.06 4050,2905 ; 4055,2910 BT1.1 4536.24,2910 4538.97,2907.27 4575.41,2907.27 U1.2 4585.19,2900 4638.1,2847.09 4638.1,2844.58 4662.68,2820 ; BT3.2@4088,2399 4092,2395 4340,2395 4635,2690 Q1.3 4635,2792.32 4662.68,2820 ; 4142.53,3665 4142.53,3620 4142.53,3579.64 4157.17,3565 4353.14,3565 4367.78,3550.36 4367.78,3507.22 JP1.4 4450,3505 4527.36,3427.64 C8.2 4599.17,3438.82 4610.35,3427.64 C7.2 C6.2 4805.08,3427.64 4834.17,3456.73 AMS1.1 4969.45,3524.45 4985,3540 4985,3602.42 4986.28,3603.7 C5.2 4992.45,3603.7 4994.97,3606.22 C4.2@5061.28,3606.22 ; 4145,3665 U?.1 ; R3.2 4662.68,2820 ; BT4.2@5040,2897 BT4.2@5311,2897 ; L2.2 5060,3604.94 C4.2@5061.28,3606.22 ; C4.2 C4.2@5061.28,3606.22
  Top Layer w45: KF7.2 2570,3326.36 2596.36,3300 2700,3300 ; 2689.54,3289.54 2997.76,3289.54 3014.09,3305.87 3014.09,3313.62 3174.84,3474.37 U2.3 3385,3510 ; C3.2@3385,3047.44 3385,3375 3385,3510 ; L1.2@3540,3552.5 3497.5,3510 3385,3510 ; BT3.2@3822,2389 BT3.2@4093,2389
pads on no net: AMS1_1.1 AMS1_1.2 AMS1_1.3 AMS1_1.4 AMS1_2.1 AMS1_2.2 AMS1_2.3 AMS1_2.4 BT1_1.1 BT1_1.2 BT1_2.1 BT1_2.2 BT2_1.1 BT2_1.2 BT2_2.1 BT2_2.2 BT3_1.1 BT3_1.2 BT3_2.1 BT3_2.2 BT4_1.1 BT4_1.2 BT4_2.1 BT4_2.2 C2_1.1 C2_1.2 C2_2.1 C2_2.2 C3_1.1 C3_1.2 C3_2.1 C3_2.2 C4_1.1 C4_1.2 C4_2.1 C4_2.2 C5_1.1 C5_1.2 C5_2.1 C5_2.2 C6_1.1 C6_1.2 C6_2.1 C6_2.2 C7_1.1 C7_1.2 C7_2.1 C7_2.2 C8_1.1 C8_1.2 C8_2.1 C8_2.2 C9_1.1 C9_1.2 C9_2.1 C9_2.2 D1_1.1 D1_1.2 D1_2.1 D1_2.2 IC1.5 IC1.6 IC1.7 IC1_1.1 IC1_1.2 IC1_1.3 IC1_1.4 IC1_1.5 IC1_1.6 IC1_1.7 IC1_1.8 IC1_2.1 IC1_2.2 IC1_2.3 IC1_2.4 IC1_2.5 IC1_2.6 IC1_2.7 IC1_2.8 JP1_1.1 JP1_1.2 JP1_1.3 JP1_1.4 JP1_2.1 JP1_2.2 JP1_2.3 JP1_2.4 JP2_1.1 JP2_1.2 JP2_2.1 JP2_2.2 JP?_1.1 JP?_1.2 JP?_2.1 JP?_2.2 KF7_1.1 KF7_1.2 KF7_2.1 KF7_2.2 L1_1.1 L1_1.2 L1_2.1 L1_2.2 L2_1.1 L2_1.2 L2_2.1 L2_2.2 Q1_1.1 Q1_1.2 Q1_1.3 Q1_2.1 Q1_2.2 Q1_2.3 R1_1.1 R1_1.2 R1_2.1 R1_2.2 R2_1.1 R2_1.2 R2_2.1 R2_2.2 R3_1.1 R3_1.2 R3_2.1 R3_2.2 R4_1.1 R4_1.2 R4_2.1 R4_2.2 R7_1.1 R7_1.2 R7_2.1 R7_2.2 R8_1.1 R8_1.2 R8_2.1 R8_2.2 R9_1.1 R9_1.2 R9_2.1 R9_2.2 R10_1.1 R10_1.2 R10_2.1 R10_2.2 R11_1.1 R11_1.2 R11_2.1 R11_2.2 R13_1.1 R13_1.2 R13_2.1 R13_2.2 R14_1.1 R14_1.2 R14_2.1 R14_2.2 R15_1.1 R15_1.2 R15_2.1 R15_2.2 U1_1.1 U1_1.2 U1_1.3 U1_1.4 U1_2.1 U1_2.2 U1_2.3 U1_2.4 U2_1.1 U2_1.2 U2_1.3 U2_2.1 U2_2.2 U2_2.3 U4.1 U4.3 U4.4 U4.10 U4.11 U4.14 U4.17 U4.18 U4.19 U4.21 U4.22 U4.26 U4.27 U4.28 U4.30 U4.31 U4.32 U4.33 U4.38 U4.39 U4.40 U4.41 U4.45 U4.46 U4_1.1 U4_1.2 U4_1.3 U4_1.4 U4_1.5 U4_1.6 U4_1.7 U4_1.8 U4_1.9 U4_1.10 U4_1.11 U4_1.12 U4_1.13 U4_1.14 U4_1.15 U4_1.16 U4_1.17 U4_1.18 U4_1.19 U4_1.20 U4_1.21 U4_1.22 U4_1.23 U4_1.24 U4_1.25 U4_1.26 U4_1.27 U4_1.28 U4_1.29 U4_1.30 U4_1.31 U4_1.32 U4_1.33 U4_1.34 U4_1.35 U4_1.36 U4_1.37 U4_1.38 U4_1.39 U4_1.40 U4_1.41 U4_1.42 U4_1.43 U4_1.44 U4_1.45 U4_1.46 U4_1.47 U4_1.48 U4_2.1 U4_2.2 U4_2.3 U4_2.4 U4_2.5 U4_2.6 U4_2.7 U4_2.8 U4_2.9 U4_2.10 U4_2.11 U4_2.12 U4_2.13 U4_2.14 U4_2.15 U4_2.16 U4_2.17 U4_2.18 U4_2.19 U4_2.20 U4_2.21 U4_2.22 U4_2.23 U4_2.24 U4_2.25 U4_2.26 U4_2.27 U4_2.28 U4_2.29 U4_2.30 U4_2.31 U4_2.32 U4_2.33 U4_2.34 U4_2.35 U4_2.36 U4_2.37 U4_2.38 U4_2.39 U4_2.40 U4_2.41 U4_2.42 U4_2.43 U4_2.44 U4_2.45 U4_2.46 U4_2.47 U4_2.48 U?.S1 U?.S2 U?.S3 U?.S4 U?_1.1 U?_1.2 U?_1.3 U?_1.4 U?_1.S1 U?_1.S2 U?_1.S3 U?_1.S4 U?_2.1 U?_2.2 U?_2.3 U?_2.4 U?_2.S1 U?_2.S2 U?_2.S3 U?_2.S4 Y1.0 Y1_1.0 Y1_1.1 Y1_1.2 Y1_2.0 Y1_2.1 Y1_2.2
copper on no net: | length 107480.1
  Top Layer w10: 3416.47,9617.74 3416.47,9615.3 3425.51,9606.25 3425.51,9546.25 3496.47,9475.3 3666.47,9475.3 3686.47,9495.3 3686.47,9565.3 3751.47,9630.3 3751.47,9849.13 3757.32,9854.99 3803.84,9854.99 3804.62,9855.77 ; 3431.47,6202.74 3431.47,6200.3 3440.51,6191.25 3440.51,6131.26 3511.47,6060.3 3681.47,6060.3 3701.47,6080.3 3701.47,6150.3 3766.47,6215.3 3766.47,6434.13 3772.32,6439.99 3818.84,6439.99 3819.62,6440.77 ; 3571.47,10125.3 3575.34,10129.17 3575.34,10161.94 3591.2,10177.8 3751.47,10177.8 ; 3586.47,6710.3 3590.34,6714.17 3590.34,6746.94 3606.2,6762.8 3766.47,6762.8 ; 3626.47,9617.97 3626.47,9770.3 3646.47,9790.3 3667.61,9790.3 3673.47,9796.15 3673.47,9857.3 3711.31,9895.14 3804.62,9895.14 ; 3626.47,9952.62 3684.14,9952.62 3721.71,9915.05 3804.39,9915.05 3804.62,9914.82 ; 3641.47,6202.97 3641.47,6355.3 3661.47,6375.3 3682.61,6375.3 3688.47,6381.15 3688.47,6442.3 3726.31,6480.14 3819.62,6480.14 ; 3641.47,6537.62 3699.14,6537.62 3736.71,6500.05 3819.39,6500.05 3819.62,6499.82 ; 3661.47,10125.3 3661.47,10122.8 3736.47,10047.8 3736.47,10003.96 3765.77,9974.66 3803.84,9974.66 3804.62,9973.88 ; 3676.47,6710.3 3676.47,6707.8 3751.47,6632.8 3751.47,6588.96 3780.77,6559.66 3818.84,6559.66 3819.62,6558.88 ; 3706.47,9075.3 3706.47,9540.3 3781.47,9615.3 3781.47,9776.12 3782.37,9777.03 3804.62,9777.03 ; v1(3706.47,9650.3) 3706.47,9840.3 3741.47,9875.3 3804.46,9875.3 3804.62,9875.45 ; 3721.47,5660.3 3721.47,6125.3 3796.47,6200.3 3796.47,6361.12 3797.37,6362.03 3819.62,6362.03 ; v1(3721.47,6235.3) 3721.47,6425.3 3756.47,6460.3 3819.46,6460.3 3819.62,6460.45 ; v1(3801.47,9400.3) 3794.15,9407.61 3794.15,9551.61 3901.79,9659.25 3901.79,9717.67 3902.57,9718.45 ; 3804.62,9836.08 3855.68,9836.08 3863.2,9828.56 ; v1(3816.47,5985.3) 3809.15,5992.61 3809.15,6136.61 3916.79,6244.25 3916.79,6302.67 3917.57,6303.45 ; 3818.38,10168.86 3817.87,10169.36 3817.87,10204.44 3823.73,10210.3 3906.47,10210.3 3941.94,10174.82 3941.94,10052.15 ; 3819.62,6421.08 3870.68,6421.08 3878.2,6413.56 ; 3833.38,6753.86 3832.87,6754.36 3832.87,6789.44 3838.73,6795.3 3921.47,6795.3 3956.94,6759.82 3956.94,6637.15 ; 3853.47,9147.3 3794.47,9147.3 3751.05,9190.71 3751.05,9533.97 3863.2,9646.12 3863.2,9718.45 ; 3863.2,10052.15 3863.2,9828.56 ; 3868.47,5732.3 3809.47,5732.3 3766.05,5775.71 3766.05,6118.97 3878.2,6231.12 3878.2,6303.45 ; 3872.43,10173.86 3883.87,10162.42 3883.87,10126.81 ; 3876.47,10273.05 3876.47,10270.3 3961.62,10185.14 3961.62,10052.15 ; 3878.2,6637.15 3878.2,6413.56 ; 3882.88,10013.3 3882.88,9973.88 4061.47,9973.88 ; 3883.66,10013.3 3883.66,10051.37 3882.88,10052.15 3883.66,10052.93 3883.66,10091 3883.87,10091.2 3883.87,10126.81 ; 3887.43,6758.86 3898.87,6747.42 3898.87,6711.81 ; 3891.47,6858.05 3891.47,6855.3 3976.62,6770.14 3976.62,6637.15 ; 3897.88,6598.3 3897.88,6558.88 4076.47,6558.88 ; 3898.66,6598.3 3898.66,6636.37 3897.88,6637.15 3898.66,6637.93 3898.66,6676 3898.87,6676.2 3898.87,6711.81 ; 3976.47,10273.05 3981.31,10268.21 3981.31,10052.15 ; 3991.47,6858.05 3996.31,6853.21 3996.31,6637.15 ; 4020.99,9585.3 4023.49,9587.8 ; 4035.99,6170.3 4038.49,6172.8 ; 4060.05,9718.45 4060.05,9796.71 ; 4075.05,6303.45 4075.05,6381.71 ; 4079.73,9718.45 4079.73,9690.89 4080.64,9689.98 4085.61,9689.98 4091.47,9684.12 v1(4091.47,9595.3) ; 4079.73,10052.15 4180.13,10052.15 4182.48,10049.8 4281.97,10049.8 4356.47,9975.3 4401.47,9975.3 ; 4081.47,9475.3 4086.47,9480.3 ; v1(4091.47,9275.3) 4146.47,9275.3 4231.47,9190.3 4231.47,9115.3 4171.47,9055.3 3826.47,9055.3 3731.97,9149.8 3731.97,9540.34 3816.47,9624.84 3816.47,9729.47 3871.47,9784.47 3871.47,9820.3 3863.2,9828.56 ; 4094.73,6303.45 4094.73,6275.89 4095.64,6274.98 4100.61,6274.98 4106.47,6269.12 v1(4106.47,6180.3) ; 4094.73,6637.15 4195.13,6637.15 4197.48,6634.8 4296.97,6634.8 4371.47,6560.3 4416.47,6560.3 ; 4096.47,6060.3 4101.47,6065.3 ; v1(4106.47,5860.3) 4161.47,5860.3 4246.47,5775.3 4246.47,5700.3 4186.47,5640.3 3841.47,5640.3 3746.97,5734.8 3746.97,6125.34 3831.47,6209.84 3831.47,6314.47 3886.47,6369.47 3886.47,6405.3 3878.2,6413.56 ; 4138.32,9777.03 4165.88,9777.03 4166.78,9776.12 4166.78,9719.98 v1(4226.47,9660.3) ; 4138.32,9855.77 4255.14,9855.77 4286.47,9824.44 4286.47,9715.3 4396.78,9604.98 4396.78,9604 4410.48,9590.3 4411.47,9590.3 ; 4138.32,9954.19 4252.57,9954.19 4331.47,9875.3 4401.47,9875.3 ; 4138.32,9973.88 4061.47,9973.88 ; 4138.32,9993.56 4268.2,9993.56 4336.47,9925.3 4526.47,9925.3 4551.47,9900.3 4551.47,9775.3 ; 4139.26,9480.3 4139.26,9717.5 4060.05,9796.71 ; 4153.32,6362.03 4180.88,6362.03 4181.78,6361.12 4181.78,6304.98 v1(4241.47,6245.3) ; 4153.32,6440.77 4270.14,6440.77 4301.47,6409.44 4301.47,6300.3 4411.78,6189.98 4411.78,6189 4425.48,6175.3 4426.47,6175.3 ; 4153.32,6539.19 4267.57,6539.19 4346.47,6460.3 4416.47,6460.3 ; 4153.32,6558.88 4076.47,6558.88 ; 4153.32,6578.56 4283.2,6578.56 4351.47,6510.3 4541.47,6510.3 4566.47,6485.3 4566.47,6360.3 ; 4154.26,6065.3 4154.26,6302.5 4075.05,6381.71 ; 4171.47,10235.3 4171.47,10268.05 4176.47,10273.05 ; 4174,10190.3 4066.47,10190.3 4026.47,10230.3 4026.47,10305.3 4006.47,10325.3 3786.47,10325.3 3751.47,10290.3 3751.47,10177.8 ; 4186.47,6820.3 4186.47,6853.05 4191.47,6858.05 ; 4189,6775.3 4081.47,6775.3 4041.47,6815.3 4041.47,6890.3 4021.47,6910.3 3801.47,6910.3 3766.47,6875.3 3766.47,6762.8 ; 4746.94,9390.3 4746.94,9440.77 4826.47,9520.3 5018.47,9520.3 5071.47,9467.3 ; 4761.94,5975.3 4761.94,6025.77 4841.47,6105.3 5033.47,6105.3 5086.47,6052.3 ; 3751.47,10177.8 3751.47,10150.3 3776.47,10125.3 3882.35,10125.3 3883.87,10126.81 ; 3766.47,6762.8 3766.47,6735.3 3791.47,6710.3 3897.35,6710.3 3898.87,6711.81 ; 4060.05,9796.71 4060.05,9972.46 4061.47,9973.88 ; 4075.05,6381.71 4075.05,6557.46 4076.47,6558.88
  Top Layer w25: 2721,9859.83 2731.47,9870.3 ; 2736,6444.83 2746.47,6455.3 ; 2771.47,9500.3 3042.47,9500.3 ; 2771.47,9688.3 2699.47,9688.3 2671.47,9660.3 2671.47,9425.3 2716.47,9380.3 2761.94,9380.3 2761.94,9114.82 2901.47,8975.3 3606.47,8975.3 3706.47,9075.3 ; 2786.47,6085.3 3057.47,6085.3 ; 2786.47,6273.3 2714.47,6273.3 2686.47,6245.3 2686.47,6010.3 2731.47,5965.3 2776.94,5965.3 2776.94,5699.82 2916.47,5560.3 3621.47,5560.3 3721.47,5660.3 ; 2796.47,9980.3 2850.01,9980.3 2971.47,10101.75 2971.47,10315.3 3011.47,10355.3 4051.47,10355.3 ; 2811.47,6565.3 2865.01,6565.3 2986.47,6686.75 2986.47,6900.3 3026.47,6940.3 4066.47,6940.3 ; 2820.99,9380.3 2820.99,9160.77 2956.47,9025.3 3496.82,9025.3 3516.47,9044.94 3516.47,9344.45 3495.62,9365.3 3422.69,9365.3 ; 2835.99,5965.3 2835.99,5745.77 2971.47,5610.3 3511.82,5610.3 3531.47,5629.94 3531.47,5929.45 3510.62,5950.3 3437.69,5950.3 ; 3051.47,9289.82 3100.99,9289.82 3126.47,9315.3 3200.25,9315.3 3311.47,9315.3 3340.99,9344.82 3340.99,9455.3 ; 3066.47,5874.82 3115.99,5874.82 3141.47,5900.3 3215.25,5900.3 3326.47,5900.3 3355.99,5929.82 3355.99,6040.3 ; 3072.31,9215.99 3064.71,9223.58 3057.67,9223.58 3051.47,9229.78 3051.47,9145.3 3076.47,9120.3 3271.47,9120.3 ; 3087.31,5800.99 3079.71,5808.58 3072.67,5808.58 3066.47,5814.78 3066.47,5730.3 3091.47,5705.3 3286.47,5705.3 ; 3110.99,9365.3 3200.25,9365.3 3200.25,9419.08 3236.47,9455.3 3282.92,9455.3 3289.12,9461.5 3289.12,9494.38 3311.44,9516.69 3400.07,9516.69 3509.04,9407.73 3601.89,9407.73 3605.87,9403.74 3619.45,9403.74 v1(3624.24,9398.96) ; 3125.99,5950.3 3215.25,5950.3 3215.25,6004.08 3251.47,6040.3 3297.92,6040.3 3304.12,6046.5 3304.12,6079.38 3326.44,6101.69 3415.07,6101.69 3524.04,5992.73 3616.89,5992.73 3620.87,5988.74 3634.45,5988.74 v1(3639.24,5983.96) ; 3200.25,9215.3 3121.47,9215.3 3105.99,9230.77 3051.47,9230.77 3000.99,9230.77 2981.47,9250.3 2981.47,9335.3 3011.47,9365.3 3051.94,9365.3 3047.2,9370.03 3047.2,9495.56 3042.47,9500.3 ; 3200.25,9265.3 3291.47,9265.3 3367.47,9189.29 3367.47,9124.29 3371.47,9120.3 ; 3215.25,5800.3 3136.47,5800.3 3120.99,5815.77 3066.47,5815.77 3015.99,5815.77 2996.47,5835.3 2996.47,5920.3 3026.47,5950.3 3066.94,5950.3 3062.2,5955.03 3062.2,6080.56 3057.47,6085.3 ; 3215.25,5850.3 3306.47,5850.3 3382.47,5774.29 3382.47,5709.29 3386.47,5705.3 ; 3416.47,9615.3 3271.47,9615.3 3156.47,9500.3 3042.47,9500.3 ; 3431.47,6200.3 3286.47,6200.3 3171.47,6085.3 3057.47,6085.3 ; 3474.03,9615.3 3623.79,9615.3 3626.47,9617.97 ; 3474.03,9945.3 3619.14,9945.3 3626.47,9952.62 ; 3489.03,6200.3 3638.79,6200.3 3641.47,6202.97 ; 3489.03,6530.3 3634.14,6530.3 3641.47,6537.62 ; 3571.47,10122.8 3571.47,10125.3 ; 3586.47,6707.8 3586.47,6710.3 ; 3848.47,9157.3 3910.27,9219.1 3945.27,9219.1 3951.47,9225.3 ; 3863.47,5742.3 3925.27,5804.1 3960.27,5804.1 3966.47,5810.3 ; 3874.68,9480.3 3946.82,9480.3 ; v1(3879.47,9575.3) 3874.68,9570.51 3874.68,9483.54 3871.43,9480.3 3859.32,9480.3 3946.82,9480.3 ; 3889.68,6065.3 3961.82,6065.3 ; v1(3894.47,6160.3) 3889.68,6155.51 3889.68,6068.54 3886.43,6065.3 3874.32,6065.3 3961.82,6065.3 ; 3961.94,9585.3 3961.47,9584.82 3961.47,9535.77 3961.47,9494.94 ; 3976.47,9370.3 3976.47,9440.3 3961.47,9455.3 3961.47,9494.94 ; 3976.94,6170.3 3976.47,6169.82 3976.47,6120.77 3976.47,6079.94 ; 3991.47,5955.3 3991.47,6025.3 3976.47,6040.3 3976.47,6079.94 ; 4010.52,9225.3 4011.51,9225.3 4017.71,9231.5 4017.71,9255.87 4032.35,9270.51 4086.68,9270.51 v1(4091.47,9275.3) ; 4023.49,9587.8 4026.21,9590.51 4086.68,9590.51 v1(4091.47,9595.3) ; 4025.52,5810.3 4026.51,5810.3 4032.71,5816.5 4032.71,5840.87 4047.35,5855.51 4101.68,5855.51 v1(4106.47,5860.3) ; 4035.52,9370.3 4035.52,9429.35 4081.47,9475.3 ; 4038.49,6172.8 4041.21,6175.51 4101.68,6175.51 v1(4106.47,6180.3) ; 4050.52,5955.3 4050.52,6014.35 4096.47,6060.3 ; 4076.47,10273.05 4076.47,10330.3 4051.47,10355.3 ; 4086.47,9480.3 4139.26,9480.3 4567.71,9480.3 4570.44,9477.57 4606.87,9477.57 4614.14,9470.3 4616.66,9470.3 4669.56,9417.39 4669.56,9414.88 4694.14,9390.3 ; 4091.47,6858.05 4091.47,6915.3 4066.47,6940.3 ; 4101.47,6065.3 4154.26,6065.3 4582.71,6065.3 4585.44,6062.57 4621.87,6062.57 4629.14,6055.3 4631.66,6055.3 4684.56,6002.39 4684.56,5999.88 4709.14,5975.3 ; 4119.47,8969.3 4123.47,8965.3 4371.47,8965.3 4666.47,9260.3 4666.47,9265.3 4666.47,9362.62 4694.14,9390.3 ; 4134.47,5554.3 4138.47,5550.3 4386.47,5550.3 4681.47,5845.3 4681.47,5850.3 4681.47,5947.62 4709.14,5975.3 ; 4174,10235.3 4174,10190.3 4174,10149.94 4188.64,10135.3 4384.6,10135.3 4399.25,10120.65 4399.25,10077.52 4401.47,10075.3 4481.47,10075.3 4558.83,9997.93 4630.64,9997.93 4630.64,10009.11 4641.82,9997.93 4731.63,9997.93 4830.64,9997.93 4836.55,9997.93 4865.64,10027.03 4865.64,10094.75 5000.91,10094.75 5016.47,10110.3 5016.47,10172.72 5017.75,10174 5018.01,10174 5023.92,10174 5026.44,10176.52 5092.75,10176.52 ; 4176.47,10235.3 4176.47,10273.05 ; 4189,6820.3 4189,6775.3 4189,6734.94 4203.64,6720.3 4399.6,6720.3 4414.25,6705.65 4414.25,6662.52 4416.47,6660.3 4496.47,6660.3 4573.83,6582.93 4645.64,6582.93 4645.64,6594.11 4656.82,6582.93 4746.63,6582.93 4845.64,6582.93 4851.55,6582.93 4880.64,6612.03 4880.64,6679.75 5015.91,6679.75 5031.47,6695.3 5031.47,6757.72 5032.75,6759 5033.01,6759 5038.92,6759 5041.44,6761.52 5107.75,6761.52 ; 4191.47,6820.3 4191.47,6858.05 ; 4401.47,9775.3 4551.47,9775.3 v1(4956.47,9775.3) 5151.94,9775.3 ; 4416.47,6360.3 4566.47,6360.3 v1(4971.47,6360.3) 5166.94,6360.3 ; 4470.52,9590.3 4571.07,9590.3 4591.07,9570.3 4614.14,9570.3 ; 4485.52,6175.3 4586.07,6175.3 4606.07,6155.3 4629.14,6155.3 ; v1(4596.47,9660.3) 4598.97,9657.8 5068.97,9657.8 5071.47,9655.3 ; v1(4611.47,6245.3) 4613.97,6242.8 5083.97,6242.8 5086.47,6240.3 ; 4630.64,9775.3 4630.64,9942.82 4731.63,9942.82 4830.64,9942.82 4836.55,9942.82 4839.07,9940.3 4926.94,9940.3 ; 4645.64,6360.3 4645.64,6527.82 4746.63,6527.82 4845.64,6527.82 4851.55,6527.82 4854.07,6525.3 4941.94,6525.3 ; 4746.94,9390.3 4694.14,9390.3 ; 4749.46,9000.3 4754.67,9005.51 4754.67,9024.51 4761.47,9031.3 4761.47,9100.3 4763.97,9102.8 4763.97,9262.8 4766.47,9265.3 ; 4761.94,5975.3 4709.14,5975.3 ; 4764.46,5585.3 4769.67,5590.51 4769.67,5609.51 4776.47,5616.3 4776.47,5685.3 4778.97,5687.8 4778.97,5847.8 4781.47,5850.3 ; 4805.99,9390.3 4812.19,9384.1 4847.67,9384.1 4866.47,9365.3 4866.47,9265.3 4871.47,9260.3 4930.62,9260.3 4945.27,9274.94 4945.27,9314.57 4951.47,9320.77 ; 4820.99,5975.3 4827.19,5969.1 4862.67,5969.1 4881.47,5950.3 4881.47,5850.3 4886.47,5845.3 4945.62,5845.3 4960.27,5859.94 4960.27,5899.57 4966.47,5905.77 ; 4861.47,9100.3 5211.47,9100.3 5421.47,9310.3 5421.47,9525.3 5376.47,9570.3 4948.79,9570.3 ; 4865.64,10185.3 v1(4956.47,10185.3) ; 4876.47,5685.3 5226.47,5685.3 5436.47,5895.3 5436.47,6110.3 5391.47,6155.3 4963.79,6155.3 ; 4880.64,6770.3 v1(4971.47,6770.3) ; 4948.79,9470.3 4950.13,9468.96 4950.13,9381.16 4951.47,9379.82 ; 4963.79,6055.3 4965.13,6053.96 4965.13,5966.16 4966.47,5964.82 ; 4985.99,9940.3 5048.97,9940.3 5088.97,9980.3 5091.47,9980.3 ; 5000.99,6525.3 5063.97,6525.3 5103.97,6565.3 5106.47,6565.3 ; 5071.47,9467.3 5342.47,9467.3 ; 5086.47,6052.3 5357.47,6052.3 ; 5091.47,10070.3 5091.47,10175.24 5092.75,10176.52 ; 5094,10176.52 5092.75,10176.52 ; 5094,10231.63 5088.1,10231.63 5085.58,10229.12 5018.01,10229.12 5012.11,10229.12 4966.47,10274.76 4866.73,10274.76 4865.64,10275.85 4861.47,10280.02 4861.47,10320.3 4826.47,10355.3 4051.47,10355.3 ; 5106.47,6655.3 5106.47,6760.24 5107.75,6761.52 ; 5109,6761.52 5107.75,6761.52 ; 5109,6816.63 5103.1,6816.63 5100.58,6814.12 5033.01,6814.12 5027.11,6814.12 4981.47,6859.76 4881.73,6859.76 4880.64,6860.85 4876.47,6865.02 4876.47,6905.3 4841.47,6940.3 4066.47,6940.3 ; 5210.99,9775.3 5296.47,9775.3 5341.47,9730.3 5341.47,9656.3 5342.47,9655.3 ; 5225.99,6360.3 5311.47,6360.3 5356.47,6315.3 5356.47,6241.3 5357.47,6240.3 ; 3946.82,9480.3 3961.47,9494.94 ; 3961.82,6065.3 3976.47,6079.94
  Top Layer w30: 2281.47,8720.3 5551.47,8720.3 5551.47,10520.3 2281.47,10520.3 2281.47,8720.3 ; 2296.47,5305.3 5566.47,5305.3 5566.47,7105.3 2296.47,7105.3 2296.47,5305.3 ; 2300,2200 5470,2200 5470,3900 2300,3900 2300,2200
  Top Layer w45: 2601.47,9980.3 2601.47,9896.66 2627.83,9870.3 2731.47,9870.3 ; 2616.47,6565.3 2616.47,6481.66 2642.83,6455.3 2746.47,6455.3 ; 2721,9859.83 3029.23,9859.83 3045.56,9876.16 3045.56,9883.91 3206.31,10044.67 3206.31,10080.3 3416.47,10080.3 ; 2736,6444.83 3044.23,6444.83 3060.56,6461.16 3060.56,6468.91 3221.31,6629.67 3221.31,6665.3 3431.47,6665.3 ; 2771.47,9688.3 3042.47,9688.3 ; 2786.47,6273.3 3057.47,6273.3 ; 2796.47,10180.3 2601.47,10180.3 2592.35,10171.18 2527.35,10171.18 2441.47,10085.3 2441.47,9080.3 2646.47,8875.3 4840.11,8875.3 4866.47,8901.66 4866.47,9000.3 4866.47,9095.3 4861.47,9100.3 ; 2811.47,6765.3 2616.47,6765.3 2607.35,6756.18 2542.35,6756.18 2456.47,6670.3 2456.47,5665.3 2661.47,5460.3 4855.11,5460.3 4881.47,5486.66 4881.47,5585.3 4881.47,5680.3 4876.47,5685.3 ; 3416.47,9617.74 3416.47,9945.3 3416.47,10080.3 ; 3431.47,6202.74 3431.47,6530.3 3431.47,6665.3 ; 3571.47,10122.8 3528.97,10080.3 3416.47,10080.3 ; 3586.47,6707.8 3543.97,6665.3 3431.47,6665.3 ; 3853.47,8959.3 4124.47,8959.3 ; 3853.47,9147.3 4124.47,9147.3 ; 3868.47,5544.3 4139.47,5544.3 ; 3868.47,5732.3 4139.47,5732.3 ; 4637.29,10185.3 4865.64,10185.3 ; 4652.29,6770.3 4880.64,6770.3 ; 5071.47,9655.3 5342.47,9655.3 ; 5086.47,6240.3 5357.47,6240.3
  Bottom Layer w10: v1(3706.47,9650.3) 3781.47,9575.3 v1(3879.47,9575.3) ; v1(3721.47,6235.3) 3796.47,6160.3 v1(3894.47,6160.3)
  Bottom Layer w25: v1(3516.47,9275.3) v1(4091.47,9275.3) v1(4091.47,9595.3) ; v1(3531.47,5860.3) v1(4106.47,5860.3) v1(4106.47,6180.3) ; v1(3624.24,9398.96) 3624.91,9399.63 3800.8,9399.63 v1(3801.47,9400.3) ; v1(3639.24,5983.96) 3639.91,5984.63 3815.8,5984.63 v1(3816.47,5985.3) ; v1(4226.47,9660.3) v1(4596.47,9660.3) ; v1(4241.47,6245.3) v1(4611.47,6245.3) ; v1(4956.47,9775.3) v1(4956.47,10185.3) ; v1(4971.47,6360.3) v1(4971.47,6770.3)
  Bottom Layer w45: v1(4091.47,9595.3) 4891.47,9595.3 4956.47,9660.3 v1(4956.47,9775.3) ; v1(4106.47,6180.3) 4906.47,6180.3 4971.47,6245.3 v1(4971.47,6360.3)

## Silkscreen, mask and mechanical layers (free items; w line width, h text height)
Drill Drawing:
  lines w10: 3495,4045 4540,4045 4540,5100 3495,5100 3495,4045